# Altium PCB LM399_ASCII.PcbDoc
Units mm, origin at the board's own origin, x right, y up, seen from the top; angles counter-clockwise.
Board outline 100 x 48.06 mm, 2 copper layers (Top Layer, Bottom Layer), stack 1.671 mm thick; 26 components, 12 nets, 81 pads, 1 vias.
Unrouted connection lines stored in the file: 3.
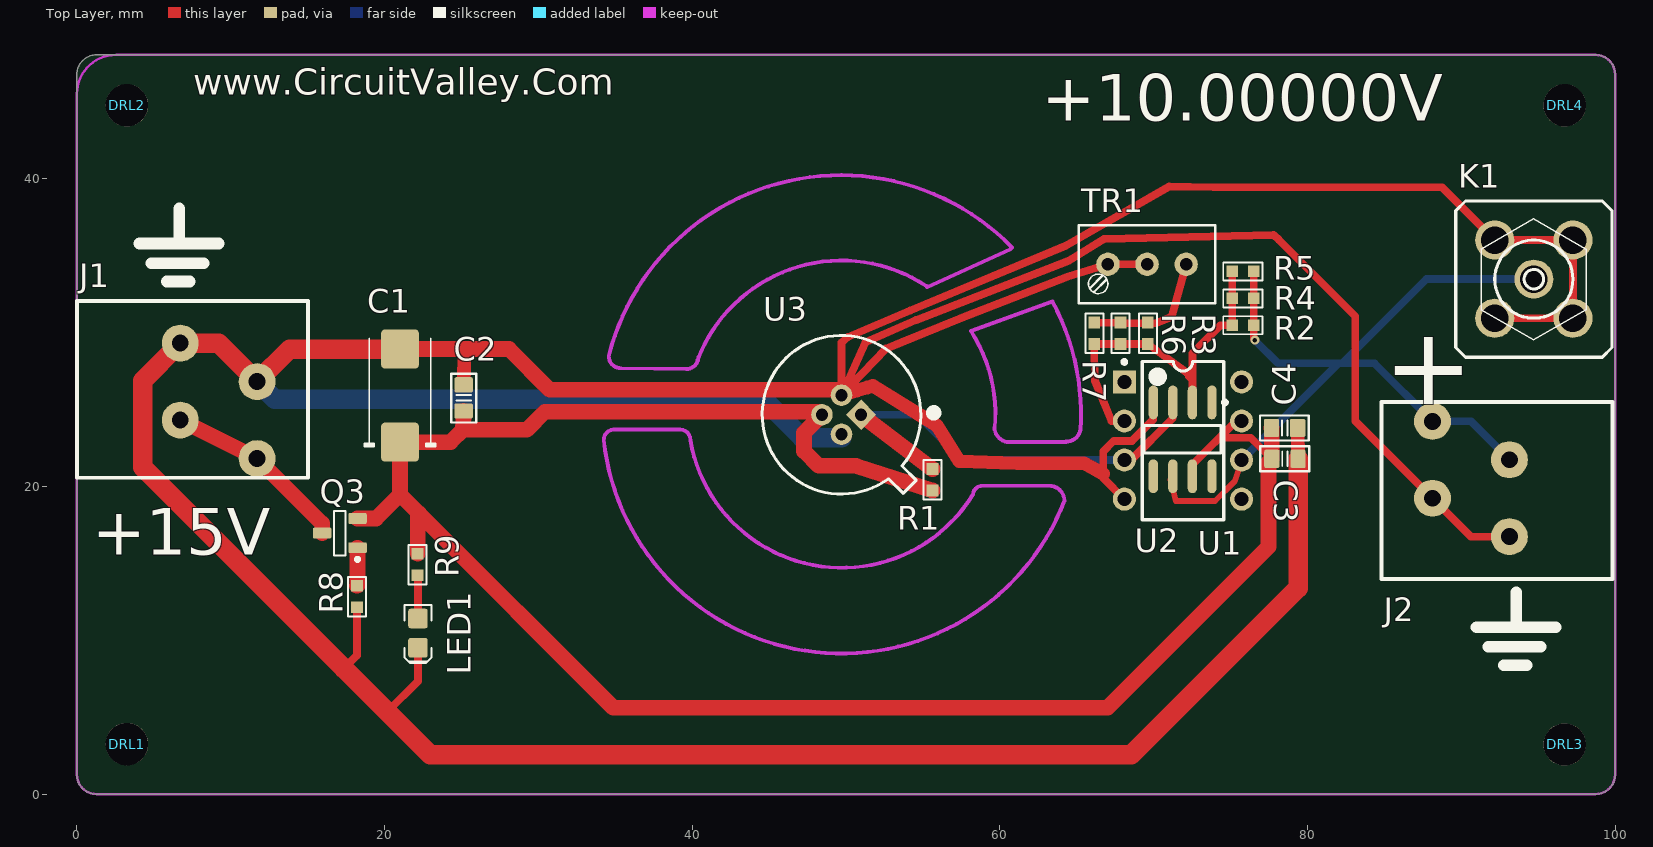
[diagram p0: Top Layer view]
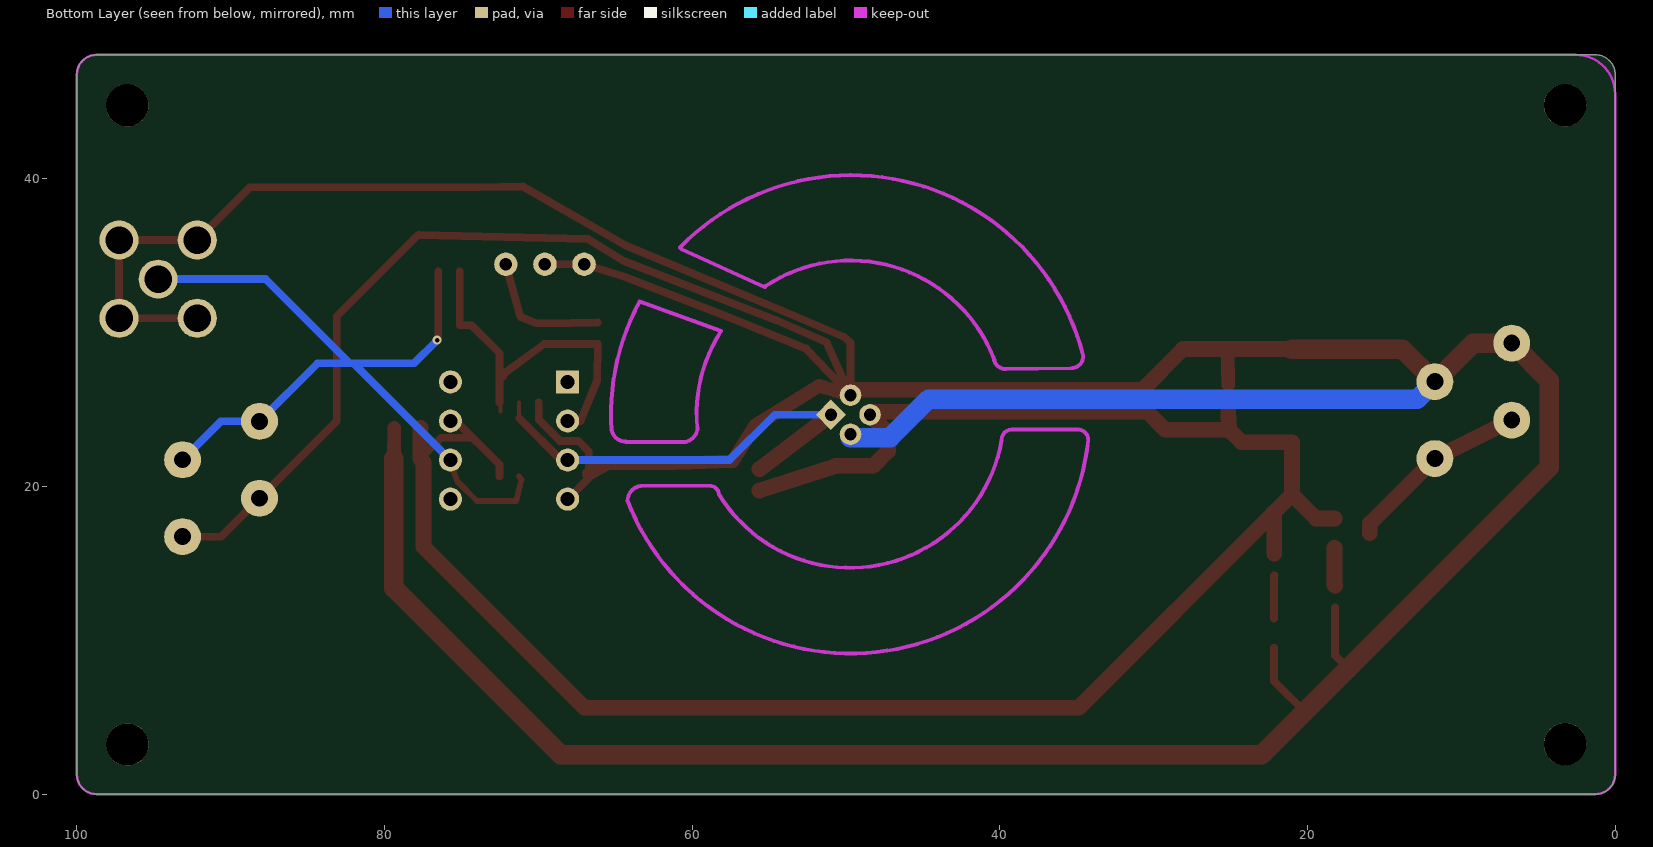
[diagram p1: Bottom Layer view, seen from below]

## Layer stack, top to bottom
Top Solder: solder mask 0.0102, Solder Resist, Dk 3.5
Top Layer: signal copper 0.0356
Dielectric 1: dielectric 1.6, FR-4, Dk 4.8
Bottom Layer: signal copper 0.0356
Bottom Solder: solder mask 0.0102, Solder Resist, Dk 3.5

## Board outline
0,1.27 0,46.787 cw(c1.27,46.787) 1.27,48.057 98.73,48.057 cw(c98.73,46.787) 100,46.787 100,1.27 cw(c98.73,1.27) 98.73,0 1.27,0 cw(c1.27,1.27)

## Design rules (kind name [scope] priority, off if disabled: settings)
AssemblyTestPointUsage [All] p0: scope1count=1 scope1_0_kind=Board scope1_0_value=Board scope2count=1 scope2_0_kind=Board scope2_0_value=Board commentlength=0
AssemblyTestpoint [All] p0: scope1count=1 scope1_0_kind=Board scope1_0_value=Board scope2count=1 scope2_0_kind=Board scope2_0_value=Board commentlength=0
Clearance [All] p0: scope1count=1 scope1_0_kind=Board scope1_0_value=Board scope2count=1 scope2_0_kind=Board scope2_0_value=Board commentlength=0 gap=0.152
Clearance [All] p1: gap=0.152
ComponentClearance [All] p0: scope1count=1 scope1_0_kind=Board scope1_0_value=Board scope2count=1 scope2_0_kind=Board scope2_0_value=Board commentlength=0 gap=0 collisioncheckmode=3
ComponentClearance [All] p1: gap=0 collisioncheckmode=3 verticalgap=0 showdistances=FALSE
DiffPairsRouting [All] p0: scope1count=1 scope1_0_kind=Board scope1_0_value=Board scope2count=1 scope2_0_kind=Board scope2_0_value=Board commentlength=0
FabricationTestPointUsage [All] p0: scope1count=1 scope1_0_kind=Board scope1_0_value=Board scope2count=1 scope2_0_kind=Board scope2_0_value=Board commentlength=0 valid=0 allowmultiple=FALSE
FabricationTestpoint [All] p0: scope1count=1 scope1_0_kind=Board scope1_0_value=Board scope2count=1 scope2_0_kind=Board scope2_0_value=Board commentlength=0 side=3 testpointundercomponent=TRUE minsize=1.016 maxsize=2.54 preferedsize=1.524 minholesize=0 maxholesize=1.016 preferedholesize=0.813 testpointgrid=0.025
FanoutControl Fanout_Default [All] p0: scope1count=1 scope1_0_kind=Board scope1_0_value=Board scope2count=1 scope2_0_kind=Board scope2_0_value=Board commentlength=30 // Fanout_Default (Default Rule)
FanoutControl Fanout_Small [All] p0 off: scope1count=1 scope1_0_kind=Board scope1_0_value=Board scope2count=1 scope2_0_kind=Board scope2_0_value=Board commentlength=84 // Protel DXP Scope 1 Expression Was: (CompPinCount < 5)   Fanout_Small (Default Rule)
FanoutControl Fanout_SOIC [All] p0 off: scope1count=1 scope1_0_kind=Board scope1_0_value=Board scope2count=1 scope2_0_kind=Board scope2_0_value=Board commentlength=71 // Protel DXP Scope 1 Expression Was: IsSOIC   Fanout_SOIC (Default Rule)
FanoutControl Fanout_LCC [All] p0 off: scope1count=1 scope1_0_kind=Board scope1_0_value=Board scope2count=1 scope2_0_kind=Board scope2_0_value=Board commentlength=69 // Protel DXP Scope 1 Expression Was: IsLCC   Fanout_LCC (Default Rule)
FanoutControl Fanout_BGA [All] p0 off: scope1count=1 scope1_0_kind=Board scope1_0_value=Board scope2count=1 scope2_0_kind=Board scope2_0_value=Board commentlength=69 // Protel DXP Scope 1 Expression Was: IsBGA   Fanout_BGA (Default Rule)
Height [All] p0: scope1count=1 scope1_0_kind=Board scope1_0_value=Board scope2count=1 scope2_0_kind=Board scope2_0_value=Board commentlength=0
HoleSize [All] p0: scope1count=1 scope1_0_kind=Board scope1_0_value=Board scope2count=1 scope2_0_kind=Board scope2_0_value=Board commentlength=0 absolutevalues=TRUE maxlimit=2.54 minlimit=0.025 maxpercent=80.000 minpercent=20.000
HoleToHoleClearance [All] p0: scope1count=1 scope1_0_kind=Board scope1_0_value=Board scope2count=1 scope2_0_kind=Board scope2_0_value=Board commentlength=0
LayerPairs [All] p0: scope1count=1 scope1_0_kind=Board scope1_0_value=Board scope2count=1 scope2_0_kind=Board scope2_0_value=Board commentlength=0 enforce=TRUE
MinimumSolderMaskSliver [All] p0: scope1count=1 scope1_0_kind=Board scope1_0_value=Board scope2count=1 scope2_0_kind=Board scope2_0_value=Board commentlength=0
NetAntennae [All] p0: scope1count=1 scope1_0_kind=Board scope1_0_value=Board scope2count=1 scope2_0_kind=Board scope2_0_value=Board commentlength=0
PasteMaskExpansion [All] p0: scope1count=1 scope1_0_kind=Board scope1_0_value=Board scope2count=1 scope2_0_kind=Board scope2_0_value=Board commentlength=0 expansion=0
PlaneClearance [All] p0: scope1count=1 scope1_0_kind=Board scope1_0_value=Board scope2count=1 scope2_0_kind=Board scope2_0_value=Board commentlength=0 clearance=0.508
PlaneConnect [All] p0: scope1count=1 scope1_0_kind=Board scope1_0_value=Board scope2count=1 scope2_0_kind=Board scope2_0_value=Board commentlength=0 planeconnectstyle=Relief reliefexpansion=0.508 reliefentries=4 reliefconductorwidth=0.254 reliefairgap=0.254
PolygonConnect [All] p0: scope1count=1 scope1_0_kind=Board scope1_0_value=Board scope2count=1 scope2_0_kind=Board scope2_0_value=Board commentlength=0 connectstyle=Relief reliefconductorwidth=0.254 reliefentries=4 polygonreliefangle="90 Angle"
PolygonConnect [All] p1: connectstyle=Relief reliefconductorwidth=0.254 reliefentries=4 polygonreliefangle="90 Angle" airgapwidth=0.254
RoutingCorners [All] p0: scope1count=1 scope1_0_kind=Board scope1_0_value=Board scope2count=1 scope2_0_kind=Board scope2_0_value=Board commentlength=0 cornerstyle=45-Degree minsetback=2.54 maxsetback=2.54
RoutingLayers [All] p0: scope1count=1 scope1_0_kind=Board scope1_0_value=Board scope2count=1 scope2_0_kind=Board scope2_0_value=Board commentlength=0 top layer=Automatic bottom layer=Automatic
RoutingPriority [All] p0: scope1count=1 scope1_0_kind=Board scope1_0_value=Board scope2count=1 scope2_0_kind=Board scope2_0_value=Board commentlength=0
RoutingTopology [All] p0: scope1count=1 scope1_0_kind=Board scope1_0_value=Board scope2count=1 scope2_0_kind=Board scope2_0_value=Board commentlength=0 topology=Shortest
RoutingVias [All] p0: scope1count=1 scope1_0_kind=Board scope1_0_value=Board scope2count=1 scope2_0_kind=Board scope2_0_value=Board commentlength=0 holewidth=0.3 width=1.27 viastyle="Through Hole" minholewidth=0.3 minwidth=0.5 maxholewidth=5 maxwidth=5
RoutingVias [All] p1: holewidth=0.3 width=1.27 viastyle="Through Hole" minholewidth=0.3 minwidth=0.5 maxholewidth=5 maxwidth=5
ShortCircuit [All] p0: scope1count=1 scope1_0_kind=Board scope1_0_value=Board scope2count=1 scope2_0_kind=Board scope2_0_value=Board commentlength=0 allowed=FALSE
SilkToBoardRegionClearance [All] p0: scope1count=1 scope1_0_kind=Board scope1_0_value=Board scope2count=1 scope2_0_kind=Board scope2_0_value=Board commentlength=0
SilkToSilkClearance [All] p0: scope1count=1 scope1_0_kind=Board scope1_0_value=Board scope2count=1 scope2_0_kind=Board scope2_0_value=Board commentlength=0
SilkToSolderMaskClearance [All] p0 off: scope1count=1 scope1_0_kind=Board scope1_0_value=Board scope2count=1 scope2_0_kind=Board scope2_0_value=Board commentlength=44 // Protel DXP Scope 1 Expression Was: IsPad
SolderMaskExpansion [All] p0: scope1count=1 scope1_0_kind=Board scope1_0_value=Board scope2count=1 scope2_0_kind=Board scope2_0_value=Board commentlength=0 expansion=0.102
SolderMaskExpansion [All] p1: expansion=0.102
UnRoutedNet [All] p0: scope1count=1 scope1_0_kind=Board scope1_0_value=Board scope2count=1 scope2_0_kind=Board scope2_0_value=Board commentlength=0
UnpouredPolygon [All] p0: scope1count=1 scope1_0_kind=Board scope1_0_value=Board scope2count=1 scope2_0_kind=Board scope2_0_value=Board commentlength=0
Width [All] p0: scope1count=1 scope1_0_kind=Board scope1_0_value=Board scope2count=1 scope2_0_kind=Board scope2_0_value=Board commentlength=0 maxlimit=12.7 minlimit=0.254 preferedwidth=0.254
Width [All] p1: maxlimit=12.7 minlimit=0.254 preferedwidth=0.254 minimp=50.000000 maximp=50.000000 favimp=50.000000
29 further rules are at their usual default settings.

## Components (designator, comment, footprint, x,y, rotation, side; value= is the part's Value field where it differs from the comment)
C1 "33uf 20V D" CAPMP7343X310N 21.006,25.908 r90 top
C2 "100n" CAPC1608N 25.146,25.756 r270 top
C3 "100n" CAPC1608N 78.537,21.793 r180 top
C4 "1u" CAPC1608N 78.511,23.8 r180 top
DRL1 "MOUNT 2.7x6.2Mask" NO_COPPER_NOMASK_2m75_6m2 3.251,3.251 r0 top
DRL2 "MOUNT 2.7x6.2Mask" NO_COPPER_NOMASK_2m75_6m2 3.251,44.78 r0 top
DRL3 "MOUNT 2.7x6.2Mask" NO_COPPER_NOMASK_2m75_6m2 96.723,3.226 r0 top
DRL4 "MOUNT 2.7x6.2Mask" NO_COPPER_NOMASK_2m75_6m2 96.723,44.78 r0 top
J1 "804-102" 804-102 7.518,26.314 r270 top
J2 "804-102" 804-102 92.329,19.736 r90 top
K1 "SMA-V" SMA-V 94.717,33.477 r180 top
LED1 "" LED-0805-K 22.174,10.465 r270 top (schematic designator LED2)
Q3 "BSS84" SOT23-3 17.094,16.967 r180 top
R1 "5K6" 0603R-GENERIC 55.626,19.736 r90 top
R2 "8.87K" 0603R-TBD 75.108,30.48 r0 top
R3 "20K" 0603R-GENERIC 69.621,30.658 r270 top
R4 "NC" 0603R-TBD 75.108,32.233 r0 top
R5 "NC" 0603R-TBD 75.108,33.985 r0 top
R6 "NC" 0603R-GENERIC 67.843,30.658 r270 top
R7 "NC" 0603R-GENERIC 66.142,30.658 r270 top
R8 "5K6" 0603R-GENERIC 18.212,13.538 r270 top
R9 "1K" 0603R-120K 22.149,15.621 r270 top
TR1 "THTRIM-GENERIC" TRIMMER-MT 72.111,34.442 r180 top
U1 "LT1001CS8" S8_N 71.882,23.063 r270 top
U2 "LT1001ACN8" N8 71.907,22.987 r0 top
U3 "LM399" TO-46 49.708,24.663 r180 top

## Footprints (in the part's own frame and the unit in brackets; to place one, negate y for a bottom-side part, rotate by r counter-clockwise, add the part's x,y. Pads: shape width x height; smd on the part's side, far side on the other; paste and mask are expansions set on the pad)
0603R-120K [mil] "RESISTOR 0603"
  rect 30x30 smd: 1(0,0) 2(55,0)
  silkscreen extent -23,-23 78,23
0603R-GENERIC [mil] "RESISTOR 0603"
  rect 30x30 smd: 1(0,0) 2(55,0)
  silkscreen extent -23,-23 78,23
0603R-TBD [mil] "RESISTOR 0603 VALUE TO BE DETERMINED"
  rect 30x30 smd: 1(0,0) 2(55,0)
  silkscreen extent -23,-23 78,23
804-102 [mm] "Wago"
  round 2.4 hole 1.1: 1(-3,-0.8) 1(-0.5,4.2) 2(2,-0.8) 2(4.5,4.2)
  silkscreen extent -5.75,-7.5 5.75,7.52
CAPC1608N [mm] "Chip Capacitor, Body 1.6x0.8mm, 0603, IPC Medium Density"
  round 0.254 on Mech14: 0(0,0)
  rrect25% 1x1.2 smd: 1(-0.85,0) 2(0.85,0)
  silkscreen extent -1.57,-0.81 1.6,0.81
CAPMP7343X310N [mm] "Molded body capacitor, Body 7.3x4.3mm, 2917, IPC Nominal settings"
  round 1 on Mech14: 0(0,0)
  rrect20% 2.55x2.45 smd: 1(-3.025,0) 2(3.025,0)
  silkscreen extent -3.3,-2.3 3.7,2.3
LED-0805-K [mil]
  round 20 on Mech14: 0(0,0)
  rrect25% 50x50 smd: A(-37.5,0) K(37.5,0)
  silkscreen extent -72,-35 77,35
N8 [mm] "DIP, 8-Leads, Row Spacing 7.62mm, Pitch 2.54mm, Body 9.78x6.48mm"
  rect 1.5x1.5 hole 0.9: 1(-3.81,3.81)
  round 1.5 hole 0.9: 2(-3.81,1.27) 3(-3.81,-1.27) 4(-3.81,-3.81) 5(3.81,-3.81) 6(3.81,-1.27) 7(3.81,1.27) 8(3.81,3.81)
  silkscreen extent -3.93,-5.15 2.65,5.23
NO_COPPER_NOMASK_2m75_6m2 [mm]
  round 6.3 on Keep-Out: 0(0,0)
  round 2.75 hole 2.75 unplated mask+0: D2m7(0,0)
S8_N [mm] "SOIC, 8-Leads, Body 4.9x3.9mm, Pitch 1.27mm, IPC Medium Density"
  oval 2.2x0.6 smd: 1(-2.4,1.905) 2(-2.4,0.635) 3(-2.4,-0.635) 4(-2.4,-1.905) 5(2.4,-1.905) 6(2.4,-0.635) 7(2.4,0.635) 8(2.4,1.905)
  silkscreen extent -2.52,-2.5 0.9,2.88
SMA-V [mil]
  round 100 hole 70: 1(0,0) 2(100,-100) 3(100,100) 4(-100,100) 5(-100,-100)
  silkscreen extent -200,-200 200,200
SOT23-3 [mm] "SOT23, 3 pin"
  round 0.5 on Mech14: 0(0,0)
  rrect25% 1.2x0.7 smd: 1(-1.15,0.95) 2(-1.15,-0.95) 3(1.15,0)
  silkscreen extent -1.25,-1.45 0.38,1.81
TO-46 [mm] "LM399"
  rect 1.4x1.4 hole 0.8 rot 45: 1(-1.27,0)
  round 1.4 hole 0.8: 2(0,-1.27) 3(1.27,0) 4(0,1.27)
  silkscreen extent -6.24,-5.16 5.16,5.16
TRIMMER-MT [mil]
  round 60 hole 32: 1(0,0) 2(200,0) W(100,0)
  silkscreen extent -75,-100 275,100

## Part data
C1: library part CAPT_330u_2917_6V3, "Capacitor SMD Tant 330uF 20% 6V3 2917"
C2 C3 C4: library part CAPC_10p_0603_NP0_1%_50V, "Capacitor SMD Cer 10pF 5% 50V NP0 0603"
DRL1 DRL2 DRL3 DRL4: library part DRILL_2.7x6.2Mask_NOCOPPER
K1: "SMA THREADED RF CONNECTOR VERTICAL"
LED1: library part LED_SMD_Green_0805, "LED, 0805 SMD, Green"
Q3: library part MOSFET_BSS84, "MOSFET SMD P-CH 50V 130mA SOT23-3"
R1 R8: library part 0603R-7K5, "GENERIC RESISTOR 0603"
R2 R4 R5: library part 0603R-TBD, "RESISTOR 0603 VALUE TO BE DETERMINED"
R3 R6 R7: library part 0603R-20K, "GENERIC RESISTOR 0603"
R9: library part 0603R-120K, "GENERIC RESISTOR 0603"
TR1: "TRIMMABLE RESISTOR"
U1 U2: "General Purpose, High Precision Op Amp"

## Via types
v1: diameter 0.6, hole 0.3, Top Layer to Bottom Layer, tented both sides, 1 vias

## Nets (pads, with @x,y where several pads share a name; then routed paths per layer and width w, separated by ;. In a path a pad name is that pad's centre, name@x,y a point inside that pad or via, vN(x,y) a via of type N, cw(c..) or ccw(c..) an arc to the next point about the centre after c; other vN are vias at no path point)
GND: C1.2 C2.1 C3.1 C4.1 J1.1 J2.1 K1.2 K1.3 K1.4 K1.5 LED1.K R8.2 TR1.2 TR1.W U1.4 U2.4 U3.2 U3.4 | length 378.2
  Top Layer w0.508: 17.361,8.166 18.212,9.017 R8.2 ; 20.18,5.347 22.174,7.341 LED1.K ; U3.2@49.96,26.49 51.267,29.381 54.551,30.813 64.476,34.679 66.777,36.093 77.8,36.347 78.156,36.017 83.109,31.064 83.109,24.256 88.129,19.236 90.629,16.736 J2.1@93.129,16.736 ; U2.4 66.726,20.549 66.726,20.828 66.726,22.276 67.412,22.962 68.588,22.962 69.977,24.351 U1.4 ; TR1.W TR1.2 64.389,33.63 57.945,31.128 57.381,30.909 53.628,29.379 52.602,28.96 50.329,26.583 49.834,26.066 U3.2 49.708,29.352 50.134,29.718 54.178,31.445 64.285,35.647 71.018,39.497 73.889,39.446 88.748,39.446 K1.2 K1.5 K1.4 K1.3
  Top Layer w0.889: C2.1 25.197,28.933 ; U3.2 50.698,26.229 51.373,26.431 51.741,26.541 55.905,23.966 57.361,21.63 60.09,21.546 61.138,21.514 65.448,21.514 66.726,20.828 ; C4.1 C3.1
  Top Layer w1.016: C1.2 25.197,28.933 28.09,28.933 30.734,26.289 49.352,26.289 U3.2
  Top Layer w1.27: C1.2 13.837,28.933 11.718,26.814 9.218,29.314 6.718,29.314 4.267,26.863 4.267,21.26 17.361,8.166 20.18,5.347 22.962,2.565 68.555,2.565 79.387,13.398 C3.1
  Bottom Layer w1.27: J1.1@11.718,26.814 12.853,25.679 44.628,25.679 47.131,23.176 49.708,23.176 U3.4
NetC1_1: C1.1 C2.2 C3.2 C4.2 Q3.2 R1.1 R9.1 U1.7 U2.7 U3.3 | length 134.4
  Top Layer w0.508: U1.7 72.517,21.412 75.362,24.257 U2.7 ; 74.27,23.165 76.315,23.165 C3.2
  Top Layer w1.016: Q3.2 19.441,17.917 21.006,19.482 ; R9.1 22.149,18.161 22.238,18.25 ; C2.2 25.103,23.693 ; R1.1 50.648,21.336 48.235,21.336 47.269,22.301 47.269,23.495 U3.3 48.235,24.867 30.429,24.867 29.255,23.693 25.103,23.693 ; C4.2 77.687,23.774 C3.2 77.47,21.576 77.47,16.078 67.005,5.613 34.874,5.613 22.238,18.25 ; 21.006,19.482 22.238,18.25 ; 21.006,19.482 C1.1 24.294,22.883 25.103,23.693
NetJ1_2: J1.2 Q3.3 | length 12.2
  Top Layer w1.016: J1.2@6.718,24.314 11.718,21.814 15.944,17.589 Q3.3
NetJ2_2: J2.2 K1.1 R2.2 R4.2 R5.2 U1.6 U2.6 | length 55.4
  Top Layer w0.381: U1.6 71.106,20.434 71.433,19.05 73.99,19.05 75.273,20.333 U2.6
  Top Layer w0.508: R5.2 R4.2 R2.2 76.505,29.591 v1(76.581,29.515)
  Bottom Layer w0.508: U2.6 82.017,28.016 ; v1(76.581,29.515) 78.08,28.016 82.017,28.016 ; J2.2@93.129,21.736 90.629,24.236 88.129,24.236 84.349,28.016 82.271,28.016 ; K1.1 87.732,33.477 82.271,28.016 ; 82.017,28.016 82.271,28.016
NetLED2_A: LED1.A R9.2 | length 2.8
  Top Layer w0.508: R9.2 22.174,14.199 LED1.A
NetQ3_1: Q3.1 R8.1 | length 2.5
  Top Layer w1.016: R8.1 18.244,13.571 Q3.1
NetR1_2: R1.2 U1.3 U2.3 U3.1 | length 29.5
  Top Layer w0.254: U1.3@71.247,24.435 U1.3
  Top Layer w0.508: U2.3 68.529,21.717 U1.3@71.247,24.435
  Top Layer w1.016: U3.1 R1.2
  Bottom Layer w0.508: U3.1 54.635,24.663 57.582,21.717 U2.3
NetR2_1: R2.1 R3.2 R4.1 R5.1 R6.2 R7.2 U1.2 U2.2 | length 25.1
  Top Layer w0.254: 72.161,27.127 72.466,26.822 U1.2@72.466,24.867
  Top Layer w0.508: U2.2 67.259,24.257 66.167,26.899 R7.2 R6.2 R3.2 72.161,27.381 ; U1.2 72.517,28.651 74.346,30.48 R2.1 R4.1 R5.1
NetR3_1: R3.1 R6.1 R7.1 TR1.1 | length 8.6
  Top Layer w0.508: R7.1 67.843,30.636 69.621,30.614 70.155,30.607 71.171,31.039 TR1.1
NetU1_1: U1.1 U2.1
NetU1_5: U1.5 U2.5
NetU1_8: U1.8 U2.8
pads on no net: C1.0 C2.0 C3.0 C4.0 DRL1.0 DRL1.D2m7 DRL2.0 DRL2.D2m7 DRL3.0 DRL3.D2m7 DRL4.0 DRL4.D2m7 LED1.0 Q3.0

## Keep-outs
Keep-Out Layer:
  lines w0.152: 2.539,48.056 ccw(c2.539,45.518) 0,45.518 0,1.27 ccw(c1.27,1.27) 1.27,0 3.658,0 98.73,0 ccw(c98.73,1.27) 100,1.27 100,46.787 ccw(c98.73,46.787) 98.73,48.057 ; 2.539,48.069 ccw(c2.551,48.069) 2.551,48.057 6.121,48.057 98.755,48.057
  lines w0.254: 34.249,23.03 ccw(c49.708,24.689) 64.2,19.056 ccw(c63.211,19.056) 63.211,20.045 62.26,20.045 58.85,20.045 ccw(c58.85,19.46) 58.266,19.46 ; 34.253,23.026 cw(c34.925,23.026) 34.925,23.698 ; 34.575,28.474 ccw(c35.362,28.474) 35.362,27.686 39.618,27.643 ; 34.577,28.473 cw(c49.657,24.689) 60.804,35.528 ; 34.891,23.698 39.209,23.698 ; 39.209,23.694 cw(c39.209,23.022) 39.882,23.022 ; 39.618,27.635 ccw(c39.618,28.423) 40.406,28.423 ; 39.882,22.997 ccw(c49.733,24.714) 58.248,19.471 ; 40.352,28.219 cw(c49.708,24.689) 55.221,33.032 ; 55.267,32.95 60.706,35.433 ; 59.655,23.847 ccw(c60.617,23.847) 60.617,22.885 64.3,22.885 ; 59.667,23.811 ccw(c49.708,24.714) 58.129,30.108 63.414,32.026 cw(c49.733,24.638) 65.25,23.657 ; 64.3,22.911 ccw(c64.3,23.873) 65.262,23.873

## Silkscreen, mask and mechanical layers (free items; w line width, h text height)
Top Overlay:
  lines w0.762: 4.064,35.789 9.22,35.789 ; 4.826,34.519 8.255,34.519 ; 5.842,33.325 7.341,33.325 ; 6.655,35.916 6.655,38.075 ; 90.983,10.846 96.139,10.846 ; 91.745,9.576 95.174,9.576 ; 92.761,8.382 94.259,8.382 ; 93.574,10.973 93.574,13.132
  text "www.CircuitValley.Com" at 7.569,45.466 h1.7
  text "+10.00000V" at 62.738,43.79 h3.05
  text "+" at 84.963,25.349 h5.08
  text "+15V" at 0.991,15.57 h3.05

## Text inside footprints (layer, text, board x,y; h text height)
C4: Mechanical 13 "LM399 Reference V1.1 1840" at 7.315,42.164 h1.7